# Altium PCB PCB2.PcbDoc
Units mm, origin at the board's own origin, x right, y up, seen from the top; angles counter-clockwise.
Board outline 3.73 x 3.73 mm, 2 copper layers (Top Layer, Bottom Layer); 27 components, 29 nets, 128 pads, 24 vias.
Unrouted connection lines stored in the file: 1.
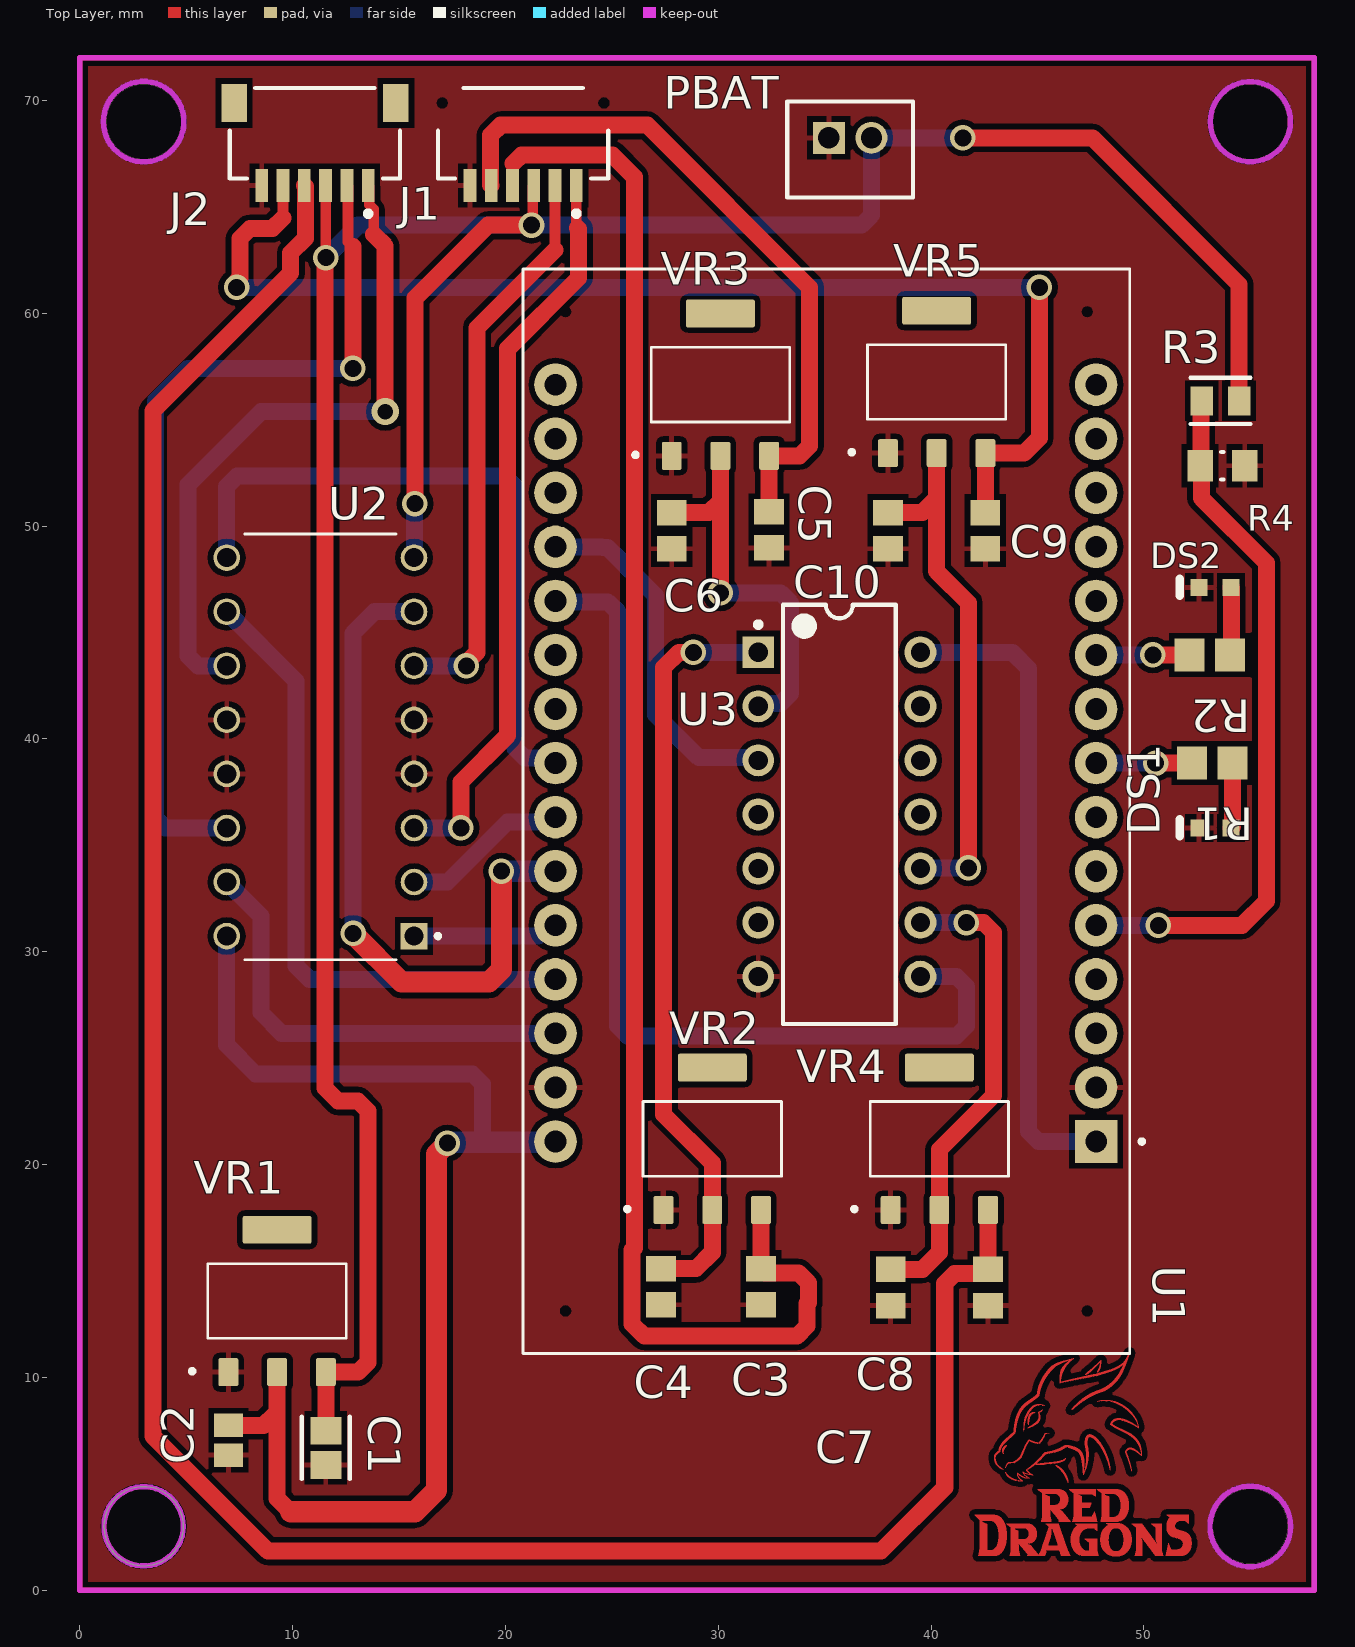
[diagram p0: Top Layer view]
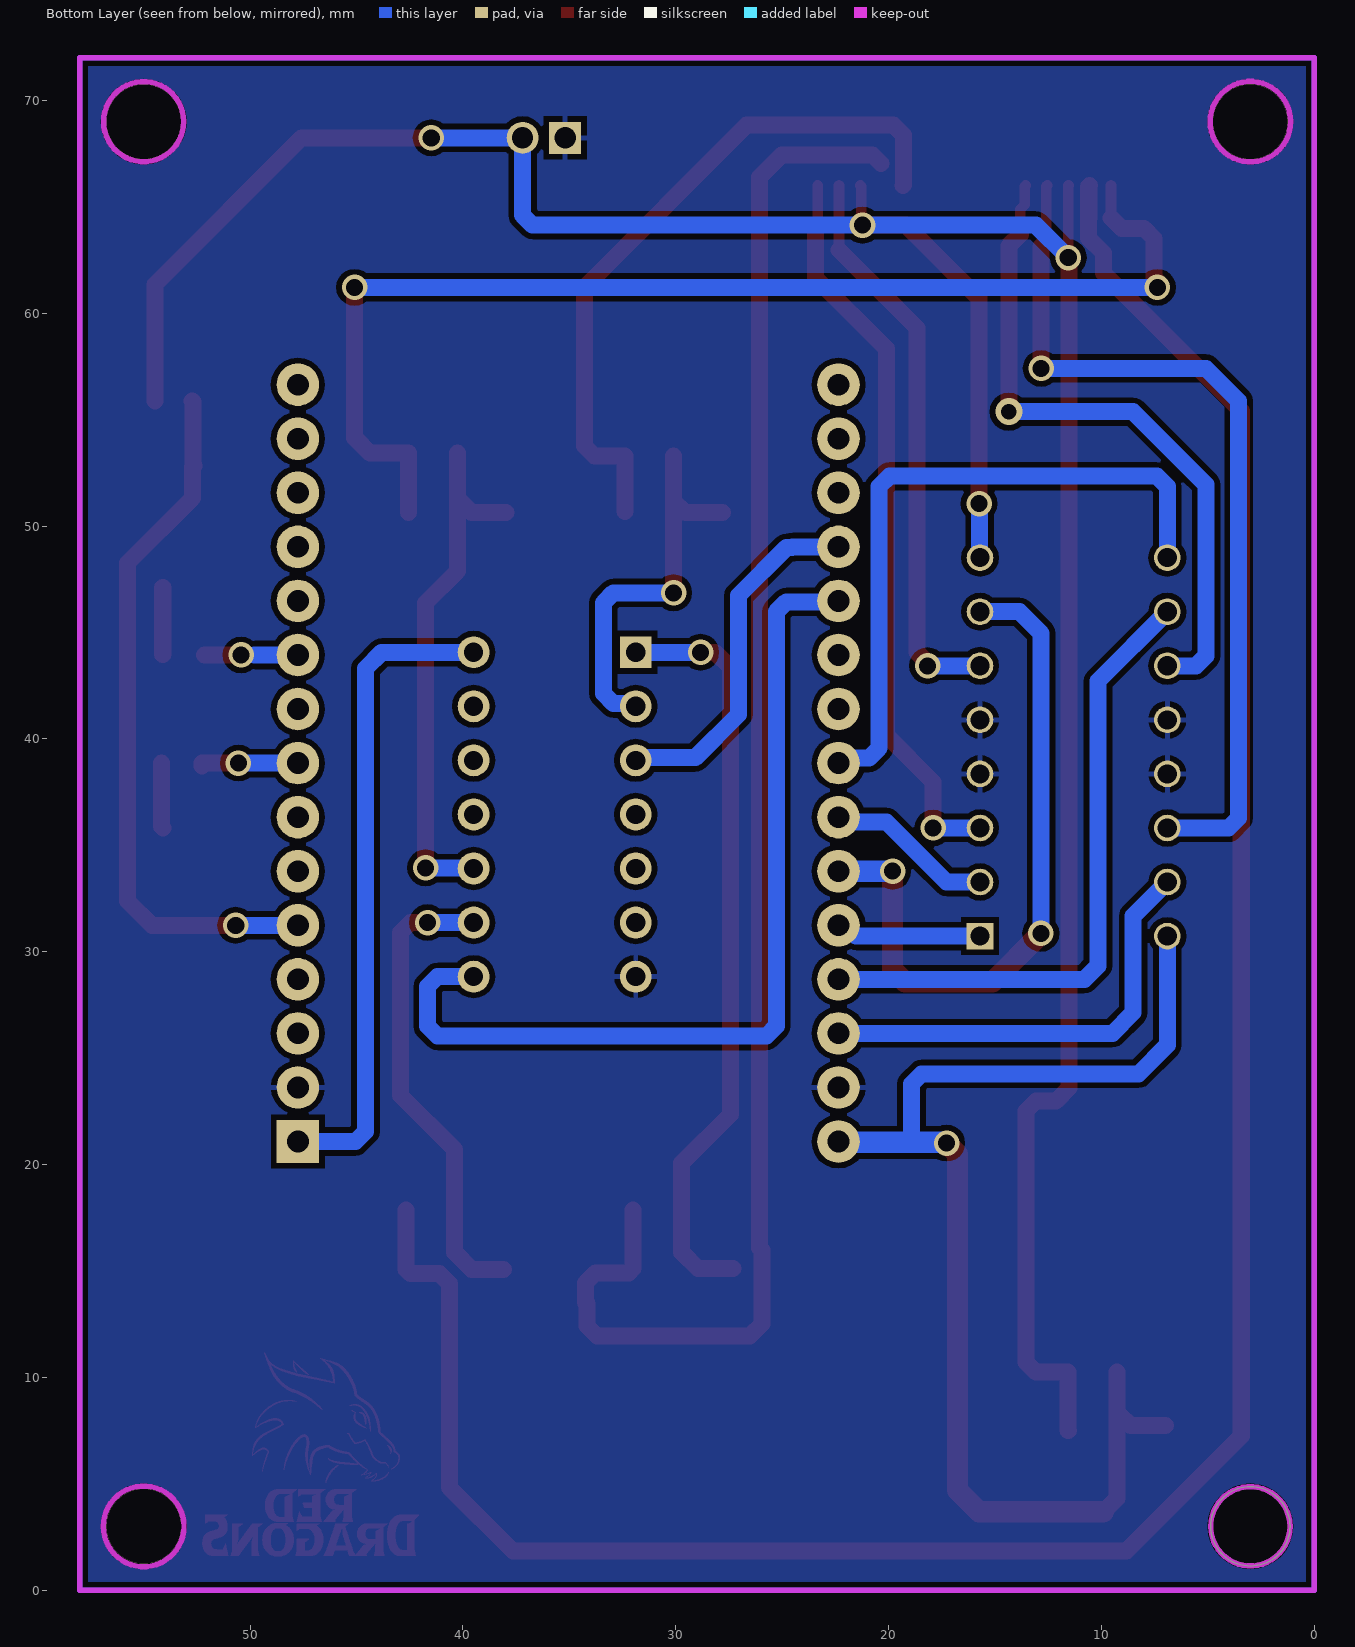
[diagram p1: Bottom Layer view, seen from below]

## Layer stack, top to bottom
Top Solder: solder mask 0.0102, Solder Resist, Dk 3.5
Top Layer: signal copper 0.0356
Dielectric 1: dielectric 0.32, FR-4, Dk 4.8
Bottom Layer: signal copper 0.0356
Bottom Solder: solder mask 0.0102, Solder Resist, Dk 3.5

## Board outline
3,1.136 cw(c3,3) 1.136,3 cw(c3,3) 3,4.864 cw(c3,3) 4.864,3 cw(c3,3)

## Design rules (kind name [scope] priority, off if disabled: settings)
Clearance [All] p1: gap=0.254 ignorepadtopadclearanceinfootprint=FALSE except(0: Arc-Hole Track-Hole SMDPad-Hole THPad-Hole Via-Hole Fill-Hole Poly-Hole Region-Hole Text-Hole)
HoleSize HoleSize_1 [IsVia] p1: absolutevalues=TRUE maxlimit=1.2 minlimit=0.025 maxpercent=80.000 minpercent=20.000
HoleSize [All] p2: absolutevalues=TRUE maxlimit=2.54 minlimit=0.025 maxpercent=80.000 minpercent=20.000
PolygonConnect [All] p1: connectstyle=Relief reliefconductorwidth=0.254 reliefentries=4 polygonreliefangle="90 Angle" airgapwidth=0.254
RoomDefinition Energia [InComponentClass('Energia')] p1: confinementstyle=ConfineIn formatcopy=TRUE lockcomponents=FALSE outline 57.785,2.255 268.605,2.255 268.605,56.611 57.785,56.611
RoutingVias [All] p1: holewidth=0.711 width=1.27 viastyle="Through Hole" minholewidth=0.711 minwidth=1.27 maxholewidth=0.711 maxwidth=1.27
SolderMaskExpansion [All] p1: expansion=0.102 istentingtop=FALSE
Width [All] p1: maxlimit=1 minlimit=0.5 preferedwidth=0.8 minimp=50.000000 maximp=50.000000 favimp=50.000000
29 further rules are at their usual default settings.

## Components (designator, comment, footprint, x,y, rotation, side; value= is the part's Value field where it differs from the comment)
C1 "330nF" FP-0805-L_2_01_0_2-W_1_25-IPC_B 11.557,6.687 r270 top
C2 "100nF" CAPC2013X140X50LL20T25 6.985,7.047 r90 top
C3 "Capacitor 10 uF +/- 10% 16 V 0805" CAPC2013X135X45NL10T25 32.004,14.263 r270 top value=10µF
C4 "Capacitor 10 uF +/- 10% 16 V 0805" CAPC2013X135X45NL10T25 27.305,14.263 r270 top value=10µF
C5 "Capacitor 10 uF +/- 10% 16 V 0805" CAPC2013X135X45NL10T25 32.385,49.823 r270 top value=10µF
C6 "Capacitor 10 uF +/- 10% 16 V 0805" CAPC2013X135X45NL10T25 27.813,49.784 r270 top value=10µF
C7 "Capacitor 10 uF +/- 10% 16 V 0805" CAPC2013X135X45NL10T25 42.672,14.224 r270 top value=10µF
C8 "Capacitor 10 uF +/- 10% 16 V 0805" CAPC2013X135X45NL10T25 38.1,14.224 r270 top value=10µF
C9 "Capacitor 10 uF +/- 10% 16 V 0805" CAPC2013X135X45NL10T25 42.545,49.784 r270 top value=10µF
C10 "Capacitor 10 uF +/- 10% 16 V 0805" CAPC2013X135X45NL10T25 37.973,49.784 r270 top value=10µF
DS1 "LTST-C190KFKT" LTST-C190KFKT_V 53.34,35.814 r180 top
DS2 "LTST-C190KFKT" LTST-C190KFKT_V 53.34,47.117 r180 top
J1 "JST-SH-6Pin" JST-SM06B-SRSS-TB_V#1 20.828,68.453 r180 top
J2 "JST-SH-6Pin" JST-SM06B-SRSS-TB_V#2 11.049,68.453 r180 top
PBAT "JST PH 2-PIN" JST-B2B-PH-K-S_V 36.195,67.691 r0 top
R1 "ERA6AEB101V" RESC2013X60X40ML20T25 53.213,38.862 r180 top
R2 "ERA6AEB101V" RESC2013X60X40ML20T25 53.086,43.942 r180 top
R3 "22k" FP-CR0805-IPC_B 53.594,55.88 r0 top
R4 "Resistor 10k +/-1% 0805 125 mW" RESC2013X50X35ML15T15 53.687,52.832 r180 top value=10k
U1 "ESP32-DEVKIT-V1" MODULE_ESP32_DEVKIT_V1 35.052,36.597 r180 top
U2 "L293D" DIP880W50P254L2000H510Q16 11.303,39.624 r180 top
U3 "SN74HC86N" N0014A 35.687,36.449 r0 top
VR1 "AMS1117-5.0" SOT229P700X180-4N 9.271,13.589 r0 top
VR2 "AMS1117-3.3" SOT229P700X180-4N 29.718,21.209 r0 top
VR3 "AMS1117-3.3" SOT229P700X180-4N 30.099,56.642 r0 top
VR4 "AMS1117-3.3" SOT229P700X180-4N 40.386,21.209 r0 top
VR5 "AMS1117-3.3" SOT229P700X180-4N 40.259,56.769 r0 top

## Footprints (in the part's own frame and the unit in brackets; to place one, negate y for a bottom-side part, rotate by r counter-clockwise, add the part's x,y. Pads: shape width x height; smd on the part's side, far side on the other; paste and mask are expansions set on the pad)
CAPC2013X135X45NL10T25 [mm] "Chip Capacitor, 2-Leads, Body 2.10x1.35mm, IPC Medium Density"
  rect 1.2x1.4 smd: 1(-0.85,0) 2(0.85,0)
  body extent -1.05,-0.67 1.05,0.67, height 1.35
CAPC2013X140X50LL20T25 [mm] "Chip Capacitor, 2-Leads, Body 2.00x1.25mm, IPC High Density"
  rect 1.1x1.35 smd: 1(-0.7,0) 2(0.7,0)
  body extent -1.1,-0.72 1.1,0.72, height 1.4
DIP880W50P254L2000H510Q16 [mm]
  rect 1.25x1.25 hole 0.9: 1(-4.4,8.89)
  round 1.25 hole 0.9: 2(-4.4,6.35) 3(-4.4,3.81) 4(-4.4,1.27) 5(-4.4,-1.27) 6(-4.4,-3.81) 7(-4.4,-6.35) 8(-4.4,-8.89) 9(4.4,-8.89) 10(4.4,-6.35) 11(4.4,-3.81) 12(4.4,-1.27) 13(4.4,1.27) 14(4.4,3.81) 15(4.4,6.35) 16(4.4,8.89)
  silkscreen extent -5.63,-10 3.55,10, body extent -5.3,-10.27 5.3,10.28, height 6
FP-0805-L_2_01_0_2-W_1_25-IPC_B [mm]
  rect 1.305x1.456 smd paste+0 mask+0: 1(-0.806,0) 2(0.806,0)
  silkscreen extent -1.46,-1.13 1.46,1.13, body extent -1.71,-0.98 1.71,0.98, height 0.25
FP-CR0805-IPC_B [mm]
  rect 1.058x1.362 smd paste+0 mask+0: 1(-0.877,0) 2(0.877,0)
  silkscreen extent -1.41,-1.08 1.41,1.08, body extent -1.66,-0.93 1.66,0.93, height 0.25
JST-B2B-PH-K-S_V [mm] "Connector, 2-Leads, Body 5.9x4.5mm, Pitch 2mm"
  rect 1.5x1.5 hole 1: 1(-1,0.55)
  round 1.5 hole 1: 2(1,0.55)
  silkscreen extent -2.95,-2.25 2.95,2.25, body extent -2.95,-2.25 2.95,2.25, height 6
JST-SM06B-SRSS-TB_V#1 [mm] "SMD, 6-Leads, Body 8x4.25mm, Pitch 1mm"
  rect 0.6x1.55 smd: 1(-2.5,2.45) 2(-1.5,2.45) 3(-0.5,2.45) 4(0.5,2.45) 5(1.5,2.45) 6(2.5,2.45)
  silkscreen extent -4,-2.12 4,3.9, body extent -4,-2.12 4,2.83, height 2.96
JST-SM06B-SRSS-TB_V#2 [mm] "SMD, 6-Leads, Body 8x4.25mm, Pitch 1mm"
  rect 0.6x1.55 smd: 1(-2.5,2.45) 2(-1.5,2.45) 3(-0.5,2.45) 4(0.5,2.45) 5(1.5,2.45) 6(2.5,2.45)
  rect 1.2x1.8 smd: MP1(-3.8,-1.425) MP2(3.8,-1.425)
  silkscreen extent -4,-2.12 4,3.9, body extent -4,-2.12 4,2.83, height 2.96
LTST-C190KFKT_V [mm] "SMD, 2-Leads, Body 1.6x0.8mm"
  rect 0.8x0.8 smd: 1(-0.75,0) 2(0.75,0)
  silkscreen extent 1.65,-0.4 1.65,0.4, body extent -0.8,-0.4 0.8,0.4, height 0.9
MODULE_ESP32_DEVKIT_V1 [mm]
  rect 2x2 hole 1.02: 1(-12.7,15.515)
  round 2 hole 1.02: 2(-12.7,12.975) 3(-12.7,10.435) 4(-12.7,7.895) 5(-12.7,5.355) 6(-12.7,2.815) 7(-12.7,0.275) 8(-12.7,-2.265) 9(-12.7,-4.805) 10(-12.7,-7.345) 11(-12.7,-9.885) 12(-12.7,-12.425) 13(-12.7,-14.965) 14(-12.7,-17.505) 15(-12.7,-20.045) 16(12.7,-20.045) 17(12.7,-17.505) 18(12.7,-14.965) 19(12.7,-12.425) 20(12.7,-9.885) 21(12.7,-7.345) 22(12.7,-4.805) 23(12.7,-2.265) 24(12.7,0.275) 25(12.7,2.815) 26(12.7,5.355) 27(12.7,7.895) 28(12.7,10.435) 29(12.7,12.975) 30(12.7,15.515)
  silkscreen extent -14.95,-25.48 14.23,25.48
N0014A [mm] "DIP, 14-Leads, Body 19.7x6.6mm, Pitch 2.54mm"
  rect 1.5x1.5 hole 0.9: 1(-3.81,7.62)
  round 1.5 hole 0.9: 2(-3.81,5.08) 3(-3.81,2.54) 4(-3.81,0) 5(-3.81,-2.54) 6(-3.81,-5.08) 7(-3.81,-7.62) 8(3.81,-7.62) 9(3.81,-5.08) 10(3.81,-2.54) 11(3.81,0) 12(3.81,2.54) 13(3.81,5.08) 14(3.81,7.62)
  silkscreen extent -3.93,-9.85 2.65,9.85, body extent -3.95,-9.85 3.95,9.85, height 5.08
RESC2013X50X35ML15T15 [mm] "Chip Resistor, 2-Leads, Body 2.2x1.4mm, IPC Low Density"
  rect 1.2x1.5 smd: 1(-1.05,0) 2(1.05,0)
  silkscreen extent -0.05,-0.65 0.05,0.65, body extent -1.1,-0.7 1.1,0.7, height 0.5
RESC2013X60X40ML20T25 [mm] "Chip Resistor, 2-Leads, Body 2.00x1.25mm, IPC Low Density"
  rect 1.4x1.55 smd: 1(-0.95,0) 2(0.95,0)
  body extent -1.1,-0.72 1.1,0.72, height 0.6
SOT229P700X180-4N [mm]
  rrect15% 0.93x1.31 smd: 1(-2.29,-3.345) 2(0,-3.345) 3(2.29,-3.345)
  rrect15% 3.24x1.31 smd: 4(0,3.345)
  silkscreen extent -4.09,-3.4 3.25,1.75, body extent -3.25,-3.5 3.25,3.5, height 1.8

## Part data
C1: library part CMP-2007-04657-2, "General Purpose Ceramic Capacitor, 0805, 330nF, 10%, X7R, 15%, 16V", Case Code (Imperial)=0805, Case Code (Metric)=2012, Dielectric=X7R, Insulation Resistance=100GR, Max Operating Temperature=125°C, Min Operating Temperature=-55°C, Package Quantity=1, Tolerance=10%, Voltage=16V, Capacitance=330nF, Case/Package=0805, Construction=Flat, Contact Plating=Tin, Depth=1.25mm, Dissipation Factor=3.5%, Height=1.4mm, Lead Free="Lead Free", Length=2.01mm, Mount="Surface Mount", Number of Pins=2, Packaging="Tape and Reel", Radiation Hardening=No, REACH SVHC="No SVHC", RoHS Compliant=Yes, Series=-, Size=1.4mm, Termination=SMD/SMT, Thickness=0.055inch, Voltage Rating=16V, Voltage Rating (DC)=16V, Width=1.25mm
C2: library part CMP-2007-04746-1, Manufacturer="AVX Interconnect / Elco", Part Number=08055C104K4T4A
C3 C4 C5 C6 C7 C8 C9 C10: library part CMP-001-00015-6, "Chip Capacitor, 10 uF, +/- 10%, 16 V, 0805 (2012 Metric)", Capacitor Type=Ceramic, Case/Package=0805, Max Operating Temperature=85°C, Min Operating Temperature=-55°C, Tolerance=10%, Voltage Rating=16V, Mounting Technology=SM, Pins=2, RoHS Compliant=True
DS1 DS2: library part CMP-007-00023-2, "LED Uni-Color Orange, 75 mW, 30 mA, -35 to 85 degC, 2-Pin SMD, RoHS, Tape and Reel", Case/Package=0603, Colour=Orange, Forward Current=20mA, Forward Voltage=2V, Manufacturer=Lite-On, Max Operating Temperature=85°C, Min Operating Temperature=-55°C, Package Description="2-Pin Surface Mount Device, Body 1.6 x 0.8 mm", Package Quantity=3000, Package Reference=C190KFKT, Power=75mW, Datasheet URL=http://optoelectronics.liteon.com/upload/download/DS-22-99-0186/S_110_LTST-C190KFKT.pdf, Datasheet Version="Rev. I, 09/2011", Illumination Colour=Orange, Lens Style=Diffused, Luminous Intensity=90mcd, Manufacturer URL=http://www.us.liteon.com/, Mounting Technology=SM, Nominal Vf=2V, Packaging=TapeandReel, Pins=2, RoHS Compliant=True, Viewing Angle=130degrees
J1 J2: library part CMP-2000-07080-1, "Male Header, Pitch 1 mm, 1 x 6 Position, Height 2.95 mm, -25 to 85 degC, RoHS, Tape and Reel", Manufacturer=JST, Package Description="Male Header, Pitch 1 mm, 1 X 6 Position, Height 2.9 mm", Package Reference=SM06B-SRSS-TB, Datasheet URL=https://datasheet.ciiva.com/26894/getdatasheetpartid-708885-26894671.pdf, Datasheet Version=11/2010, Manufacturer URL=http://www.jst.com/home2.html, Mounting Technology=SurfaceMount, No of Positions=6, Pitch=1mm, Style/Orientation=RightAngleHeader/Plug, Termination=Solder, Type=ShroudedHeader
PBAT: library part CMP-2000-05162-1, "Male Header, Pitch 2 mm, 1 x 2 Position, Height 6 mm, Tail Length 3.4 mm, -25 to 85 degC, RoHS, Bulk", Manufacturer=JST, Datasheet URL=http://datasheet.octopart.com/B2B-PH-K-S%28LF%29%28SN%29-JST-datasheet-8324864.pdf, Datasheet Version=Nov-08, Manufacturer URL=http://www.jst.com/home2.html, No of Positions=2, Pitch=2mm, Style/Orientation=StraightHeader/Plug, Termination=Crimp, Type=ShroudedHeader
R1 R2: library part CMP-2001-00580-1, Manufacturer=Panasonic, Part Number=ERA6AEB101V
R3: library part CMP-07231-001007-1, "Thick Film Chip Resistors 0805 22kΩ 0.125W 5% 200ppm/°C", Case Code (Imperial)=0805, Case Code (Metric)=2012, Max Operating Temperature=155°C, Min Operating Temperature=-55°C, Package Quantity=5000, Power Rating=125mW, Resistance=22kR, Temperature Coefficient=200ppm/°C, Tolerance=5%, Voltage Rating=150V, Case/Package=0805, Composition="Thick Film", Contact Plating=Tin, Depth=1.25mm, Height=0.5mm, Length=2mm, Military Standard=Not, Mount="Surface Mount", Packaging="Tape and Reel", Radiation Hardening=No, Termination=SMD/SMT, Thickness=508um, Width=1.25mm
R4: library part CMP-009-00018-5, "Chip Resistor, 10 KOhm, +/- 1%, 125 mW, -55 to 155 degC, 0805 (2012 Metric)", Case/Package=0805, Max Operating Temperature=155°C, Min Operating Temperature=-55°C, Power=125mW, Tolerance=1%, Voltage Rating=150V, Mounting Technology=SM, Pins=2, RoHS Compliant=True
U1: "Dual core, Wi-Fi: 2.4 GHz up to 150 Mbits/s,BLE (Bluetooth Low Energy) and legacy Bluetooth, 32 bits, Up to 240 MHz", Package=None, Availability=Unavailable, MF="{'manufacturer': u'Do it'}", MP=ESP32-DEVKIT-V1, Price=None
U2: "4-Channel Motor Driver 24V 16-Pin Power PDIP Tube", Package=None, Availability=Unavailable, MF="{'manufacturer': u'STMicroelectronics'}", MP=L293D, Price=None
U3: library part CMP-024-00000-1, "4-ch, 2-input, 2-V to 6-V XOR (exclusive OR) gates 14-PDIP -40 to 85"
VR1: Package=None, Availability=Unavailable, MF="{'manufacturer': u'ams'}", MP=AMS1117-5.0, Price=None
VR2 VR3 VR4 VR5: "Sot223/Pkg 1-Amp 3.3-Volt Low Drop Out Voltage Regulatator", Package=None, Availability=Unavailable, MF="{'manufacturer': u'Advanced Monolithic Systems'}", MP=AMS1117-3.3, Price=None

## Via types
v1: diameter 1.2, hole 0.8, Top Layer to Bottom Layer, 19 vias
v2: diameter 3.5/3.5 (per signal layer), hole 3.5, Top Layer to Bottom Layer, 2 vias
v3: diameter 3.5, hole 3.5, Top Layer to Bottom Layer, 2 vias
v4: diameter 1.27, hole 0.711, Top Layer to Bottom Layer, 1 vias

## Nets (pads, with @x,y where several pads share a name; then routed paths per layer and width w, separated by ;. In a path a pad name is that pad's centre, name@x,y a point inside that pad or via, vN(x,y) a via of type N, cw(c..) or ccw(c..) an arc to the next point about the centre after c; other vN are vias at no path point)
+3V: U1.1 U3.14 | length 30.5
  Bottom Layer w0.8: U3.14 43.815,44.069 44.577,43.307 44.577,21.551 45.046,21.082 U1.1
+3V3A1: C4.1 U3.1 VR2.2 | length 35.9
  Top Layer w0.8: C4.1 28.956,15.113 29.718,15.875 VR2.2 29.718,20.066 27.432,22.352 27.432,43.346 28.155,44.069 v1(28.829,44.069)
  Bottom Layer w0.8: v1(28.829,44.069) U3.1
+3V3A2: C8.1 U3.9 VR4.2 | length 22.3
  Top Layer w0.8: C8.1 39.585,15.074 40.386,15.875 VR4.2 40.386,20.701 42.926,23.241 42.926,30.9 42.457,31.369 v1(41.656,31.369)
  Bottom Layer w0.8: U3.9 v1(41.656,31.369)
+3V3B1: C6.1 U3.2 VR3.2 | length 18.5
  Top Layer w0.8: C6.1 29.552,50.634 30.099,51.181 ; v1(30.099,46.863) 30.099,51.181 ; VR3.2 30.099,51.181 ; U3.2 U3.2@31.916,41.568
  Bottom Layer w0.8: v1(30.099,46.863) 32.932,46.863 33.401,46.394 33.401,42.132 32.932,41.663 32.011,41.663 U3.2
+3V3B2: C10.1 U3.10 VR5.2 | length 24.9
  Top Layer w0.8: C10.1 39.585,50.634 40.259,51.308 ; VR5.2 40.259,51.308 ; v1(41.751,33.941) 41.751,46.387 40.259,47.879 40.259,51.308
  Bottom Layer w0.8: U3.10 39.513,33.925 41.736,33.925 v1(41.751,33.941)
+5V: C2.2 U1.30 U2.16 VR1.2 | length 58.7
  Top Layer w0.8: C2.2 8.636,7.747 9.144,8.255 ; VR1.2 9.271,4.318 9.906,3.683
  Top Layer w1: 9.906,3.683 15.748,3.683 16.764,4.699 16.764,20.496 v1(17.272,21.004)
  Bottom Layer w0.8: U2.16 6.903,25.609 8.255,24.257 18.454,24.257 18.923,23.788 18.923,21.043
  Bottom Layer w1: v1(17.272,21.004) 17.311,21.043 18.923,21.043 22.313,21.043 U1.30
EN1: U1.26 U2.1 | length 7.2
  Top Layer w0.8: U1.26@22.027,31.242 U1.26
  Bottom Layer w0.8: U2.1 21.519,30.734 22.027,31.242 U1.26
EN2: U1.23 U2.9 | length 31.8
  Top Layer w0.8: U2.9 U2.9@6.905,48.516
  Bottom Layer w0.8: U2.9 6.903,51.855 7.391,52.343 19.959,52.343 20.447,51.855 20.447,39.56 20.916,39.092 22.122,39.092 U1.23
GND: C1.2 C2.1 C3.2 C4.2 C5.2 C6.2 C7.2 C8.2 C9.2 C10.2 DS1.2 DS2.2 J1.6 J2.6 PBAT.1 R4.1 U1.2 U1.29 U2.4 U2.5 U2.12 U2.13 U3.7 VR1.1 VR2.1 VR3.1 VR4.1 VR5.1 | length 0
  Top Layer w0.8: U2.4@15.703,38.331 U2.4
IN1: U1.24 U2.2 | length 8.1
  Top Layer w0.8: U1.24@22.225,36.449 U1.24
  Bottom Layer w0.8: U2.2 17.272,33.274 20.09,36.092 22.122,36.092 U1.24
IN2: U1.25 U2.7 | length 32.7
  Top Layer w1: v1(12.846,30.861) 12.846,30.842 15.113,28.575 19.226,28.575 19.812,29.161 v1(19.812,33.782)
  Bottom Layer w0.8: v1(12.846,30.861) 12.827,30.88 12.827,44.958 13.843,45.974 U2.7
  Bottom Layer w1: v1(19.812,33.782) U1.25
IN3: U1.27 U2.10 | length 30.6
  Top Layer w0.8: U2.10 U2.10@6.989,45.888
  Bottom Layer w0.8: U2.10 10.16,42.717 10.16,29.337 10.795,28.702 U1.27
IN4: U1.28 U2.15 | length 21.2
  Top Layer w0.8: U2.15 U2.15@6.989,33.188
  Bottom Layer w0.8: U2.15 8.509,31.668 8.509,27.139 9.486,26.162 U1.28
LED_COM: R2.2 U1.10 | length 3.7
  Top Layer w0.8: v1(50.419,43.942) R2.2
  Bottom Layer w0.8: U1.10 49.784,43.942
NetC3_1: C3.1 J1.4 VR2.3 | length 76.2
  Top Layer w0.8: 20.36,67.035 20.762,67.437 25.019,67.437 26.054,66.402 26.054,16.087 25.951,15.984 25.951,12.51 26.523,11.938 33.706,11.938 34.175,12.407 34.175,13.467 34.236,13.529 34.236,14.444 33.767,14.913 32.208,14.913 32.006,15.115 32.006,17.862 VR2.3
NetC5_1: C5.1 J1.5 VR3.3 | length 32.9
  Top Layer w0.8: J1.5 19.306,66.025 19.306,68.365 19.775,68.834 26.67,68.834 34.29,61.214 34.29,53.766 33.821,53.297 VR3.3 32.387,53.295 32.387,50.675 C5.1
NetC7_1: C7.1 J2.4 VR4.3 | length 117.1
  Top Layer w0.8: J2.4 10.595,65.957 10.595,64.477 10.603,64.469 10.603,63.522 9.906,62.825 9.906,61.878 3.429,55.401 3.429,7.239 8.832,1.836 37.65,1.836 40.64,4.826 40.64,14.405 41.109,14.874 42.472,14.874 42.674,15.076 42.674,17.862 VR4.3
NetC9_1: C9.1 J2.5 VR5.3 | length 56.7
  Top Layer w0.5: 9.549,64.472 J2.5
  Top Layer w0.8: v1(7.366,61.214) 7.443,61.291 7.443,61.573 7.521,61.652 7.521,63.507 7.99,63.975 9.044,63.975 9.541,64.472 ; C9.1 42.547,50.636 42.547,53.422 VR5.3 44.362,53.424 45.085,54.147 v1(45.085,61.214)
  Bottom Layer w0.8: v1@7.382,61.23 7.398,61.214 v1(45.085,61.214)
NetDS1_1: DS1.1 R1.1 | length 3.1
  Top Layer w0.8: DS1.1 54.163,35.887 R1.1
NetDS2_1: DS2.1 R2.1 | length 3.2
  Top Layer w0.8: DS2.1 54.102,47.105 R2.1@54.102,43.957
NetJ1_1: J1.1 U2.3 | length 34.7
  Top Layer w0.5: J1.1 23.328,64.062 23.382,64.008
  Top Layer w0.8: v1(17.907,35.814) 17.907,37.973 20.104,40.17 20.104,58.331 23.432,61.659 23.432,63.958 23.382,64.008
  Bottom Layer w0.8: U2.3 v1(17.907,35.814)
NetJ1_2: J1.2 U2.6 | length 26.8
  Top Layer w0.5: 22.328,62.968 J1.2
  Top Layer w0.8: v1(18.161,43.434) 18.161,43.561 18.669,44.069 18.669,59.309 22.328,62.968
  Bottom Layer w0.8: U2.6 v1(18.161,43.434)
NetJ2_1: J2.1 U2.11 | length 31.8
  Top Layer w0.5: J2.1 13.599,65.953 13.599,65.096 13.811,64.884 13.811,63.705
  Top Layer w0.8: U2.11@6.817,43.52 U2.11 ; 13.811,63.705 14.351,63.165 v4(14.351,55.372)
  Bottom Layer w0.8: U2.11 5.549,43.434 5.08,43.903 5.08,51.943 8.509,55.372 v4(14.351,55.372)
NetJ2_2: J2.2 U2.14 | length 41.9
  Top Layer w0.5: J2.2 12.599,65.953 12.599,63.363 12.827,63.135
  Top Layer w0.8: U2.14@6.817,35.9 U2.14 ; v1(12.827,57.404) 12.827,63.135
  Bottom Layer w0.8: U2.14 4.025,35.814 3.556,36.283 3.556,55.88 5.08,57.404 v1(12.827,57.404)
NetR1_2: R1.2 U1.8 | length 4.9
  Top Layer w0.8: U1.8 U1.8@47.879,38.735 ; v1(50.546,38.862) R1.2@52.136,38.862 ; R1.2@52.263,38.735 R1.2@52.136,38.862 ; R1.2 R1.2@52.136,38.862
  Bottom Layer w0.8: U1.8 v1(50.546,38.862)
NetR3_1: R3.1 R4.2 U1.5 | length 33.3
  Top Layer w0.8: v1(50.673,31.242) 54.61,31.242 55.753,32.385 55.753,48.26 52.705,51.308 52.705,52.764 R4.2 52.677,52.872 52.677,55.84 R3.1
  Bottom Layer w0.8: U1.5 v1(50.673,31.242)
NetU1_19: U1.19 U3.3 | length 17
  Top Layer w0.8: U3.3@31.813,39.052 U3.3
  Bottom Layer w0.8: U1.19 24.511,49.022 24.549,48.984 24.803,48.984 27.051,46.736 27.051,41.148 29.083,39.116 31.75,39.116 U3.3
NetU1_20: U1.20 U3.8 | length 43.8
  Top Layer w0.8: U1.20 U1.20@22.516,46.318
  Bottom Layer w0.8: U1.20 22.393,46.441 24.804,46.441 25.273,45.972 25.273,26.504 25.742,26.035 41.187,26.035 41.656,26.504 41.656,28.36 41.187,28.829 U3.8
VBAT: C1.1 J1.3 J2.3 PBAT.2 R3.2 U2.8 VR1.3 | length 138.3
  Top Layer w0.5: J2.3 11.553,65.999 11.553,62.615 v1(11.557,62.611) ; v1(21.224,64.135) 21.278,64.189 21.278,65.953 J1.3
  Top Layer w0.8: C1.1 11.559,7.495 11.559,10.242 13.075,10.242 13.544,10.711 13.544,22.518 13.075,22.987 12.126,22.987 11.519,23.594 11.519,62.573 v1(11.557,62.611) ; v1(15.748,51.054) 15.748,60.706 19.177,64.135 v1(21.224,64.135) ; v1(41.487,68.241) 47.583,68.241 54.471,61.353 R3.2
  Bottom Layer w0.8: v1(11.557,62.611) 13.081,64.135 v1(21.224,64.135) ; U2.8 15.726,48.537 15.726,51.032 v1(15.748,51.054) ; v1@21.324,64.135 36.726,64.135 37.195,64.604 PBAT.2 v1(41.487,68.241)
pads on no net: J2.MP1 J2.MP2 U1.3 U1.4 U1.6 U1.7 U1.9 U1.11 U1.12 U1.13 U1.14 U1.15 U1.16 U1.17 U1.18 U1.21 U1.22 U3.4 U3.5 U3.6 U3.11 U3.12 U3.13 VR1.4 VR2.4 VR3.4 VR4.4 VR5.4
copper on no net: | length 0.4
  Top Layer w0.8: 47.752,41.201 47.752,41.402 47.918,41.236
  other v2: 3,3 55,3
  other v3: 3,69 55,69

## Polygon pours and split planes (outlines as drawn)
GND on Bottom Layer "GND_L02_P001" (solid, pour order 1): 0,0 0,72 58,72 58,0
GND on Top Layer "GND_L01_P002" (solid, pour order 2): 0,0 0,72 58,72 58,0

## Keep-outs
Keep-Out Layer:
  circle w0.254: c3,3 r1.864
  circle w0.254: c3,69 r1.892
  circle w0.254: c55,69 r1.882
  circle w0.254: c55,3 r1.896
  lines w0.254: 0,0 58,0 58,72 0,72 0,0

## Other copper
Top Layer:
  drawing of 22 lines, arcs and shapes, not listed
Multi-Layer:
  lines w0.254: 0,0 58,0 58,72 0,72 0,0